# Altium PCB KATADC_V1-3.PcbDoc (part 3 of 7)
Units mm, origin at the board's own origin, x right, y up, seen from the top; angles counter-clockwise.
Board outline 127 x 85.85 mm, 6 copper layers (Top Layer, InnerPlane1, InnerPlane2, InnerPlane3, InnerPlane4, Bottom Layer), stack 1.255 mm thick; 189 components, 188 nets, 905 pads, 1090 vias.
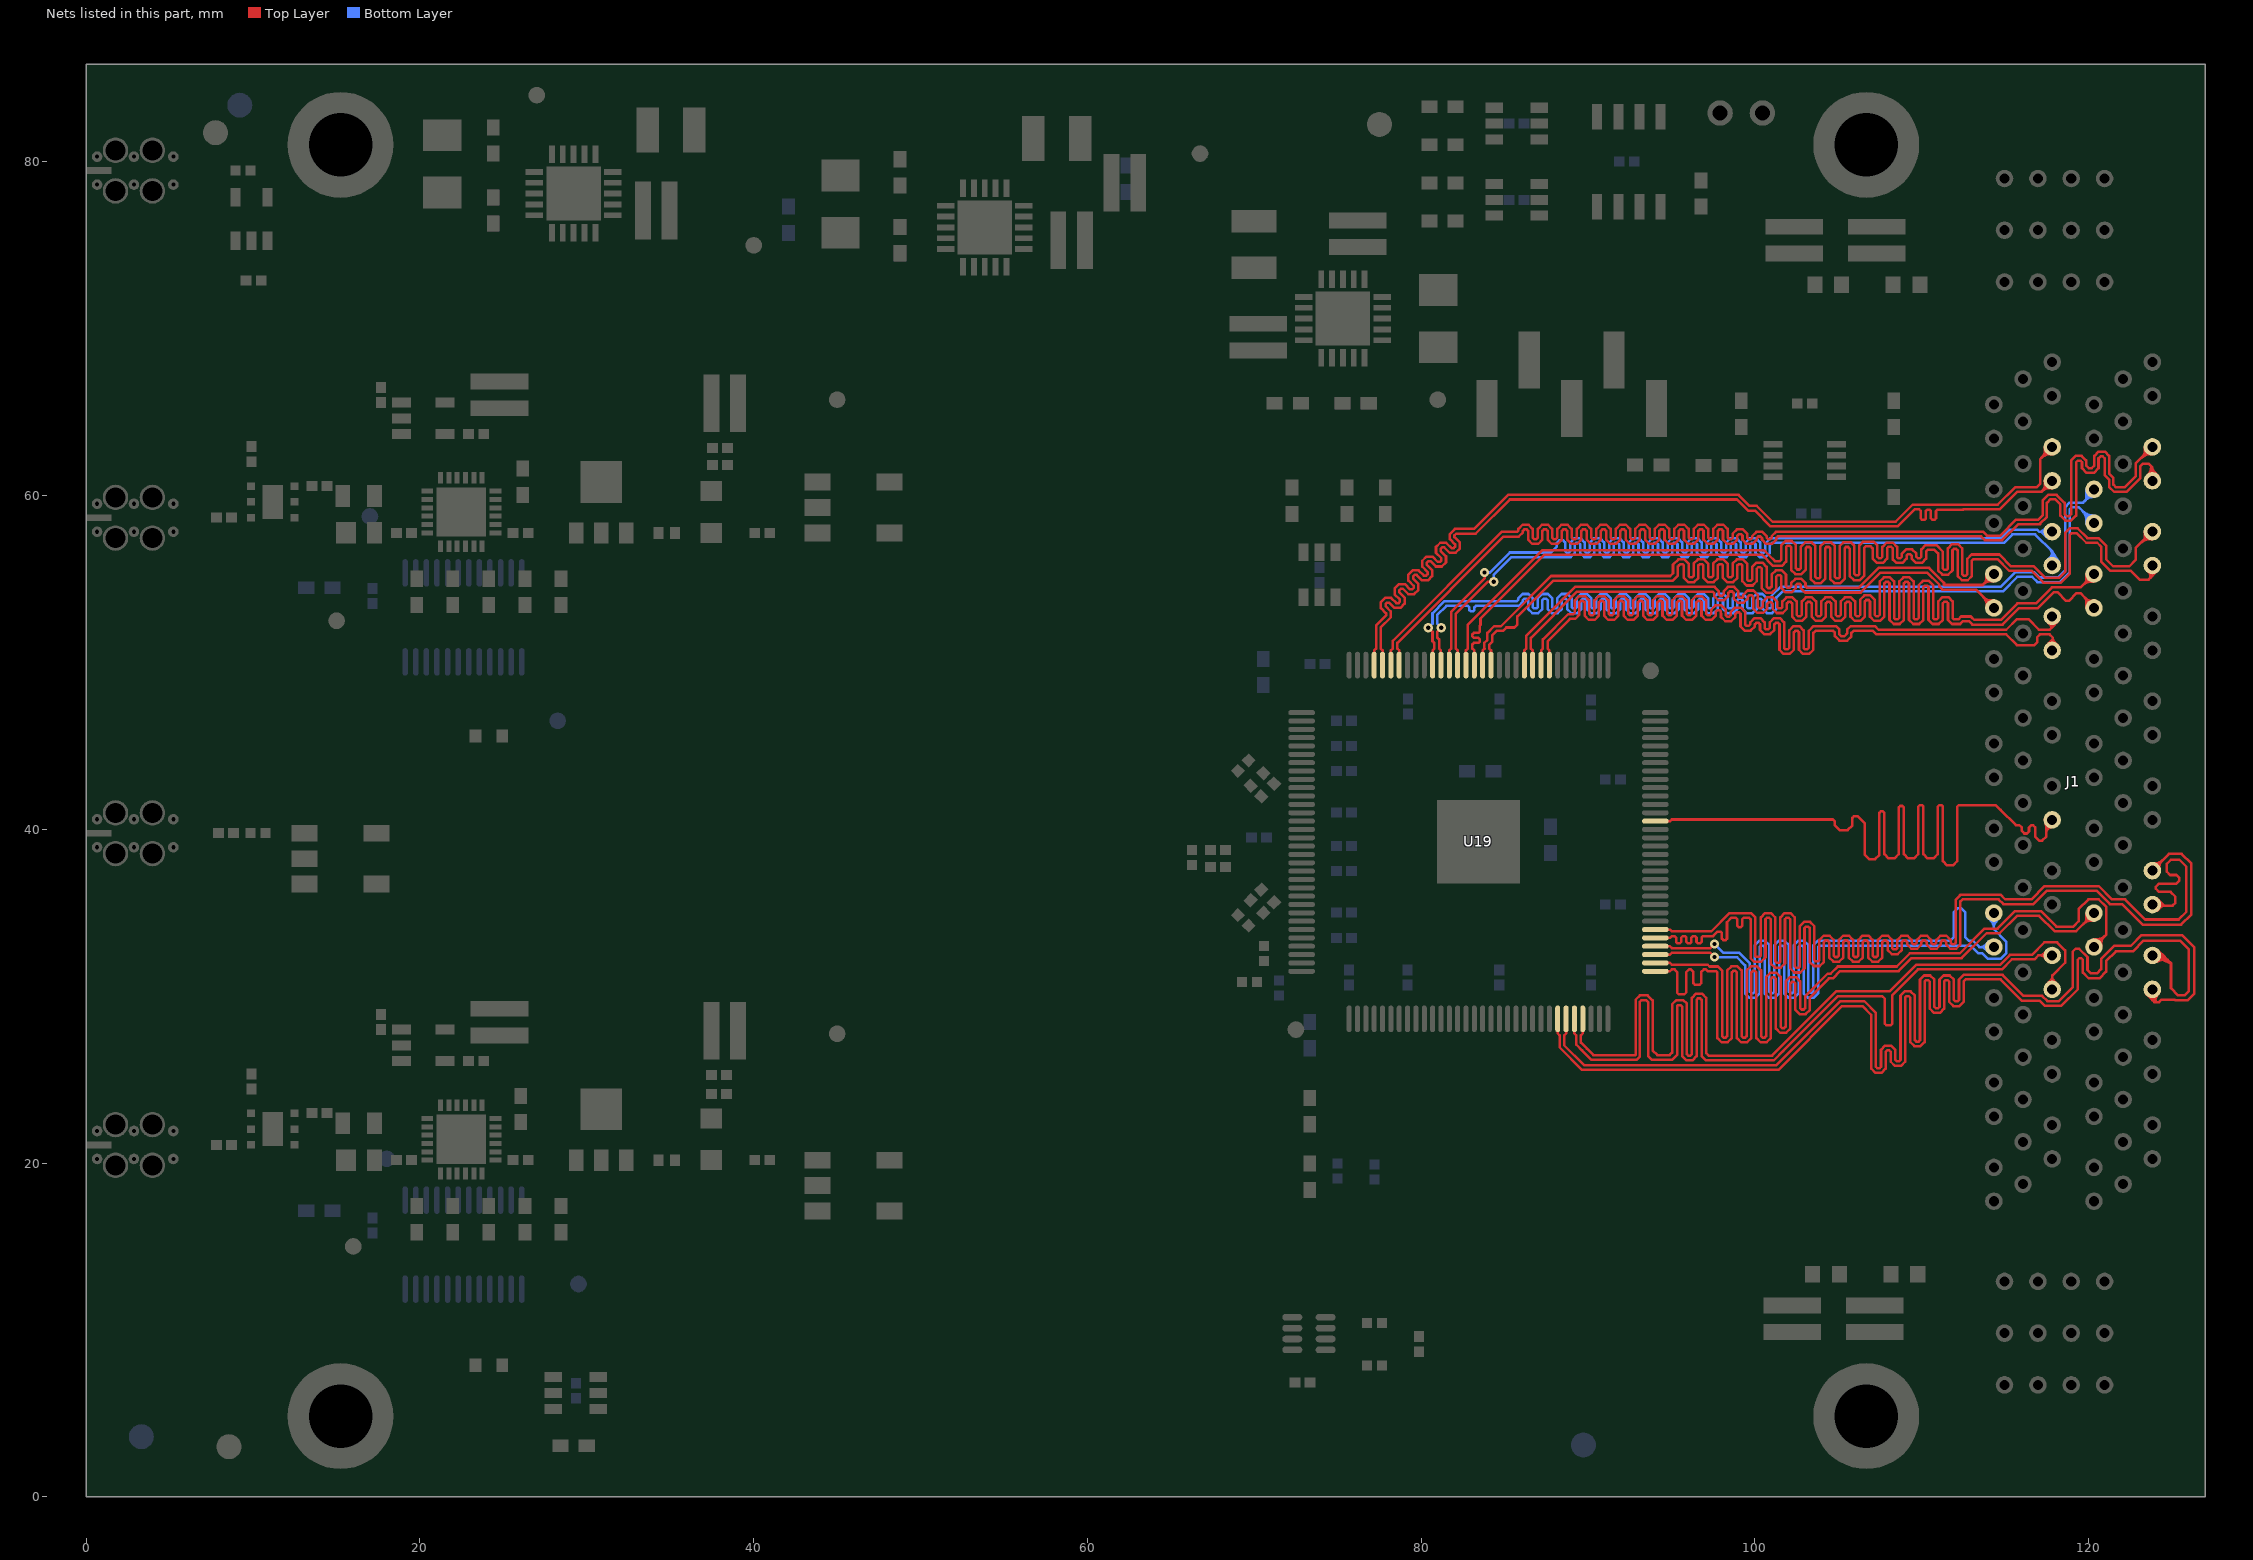
[diagram p7: the nets of this part, all layers, seen from the top]

## Via types
v1: diameter 0.55, hole 0.25, Top Layer to Bottom Layer, tented both sides, 1066 vias
v2: diameter 3.302, hole 2.2, Top Layer to Bottom Layer, tented both sides, 18 vias
v3: diameter 0.65, hole 0.25, Top Layer to Bottom Layer, tented both sides, 4 vias
v4: diameter 0.51, hole 0.25, Top Layer to Bottom Layer, tented both sides, 1 vias
v5: diameter 0.55, hole 0.25, Top Layer to Bottom Layer, 1 vias

## Nets (pads, with @x,y where several pads share a name; then routed paths per layer and width w, separated by ;. In a path a pad name is that pad's centre, name@x,y a point inside that pad or via, vN(x,y) a via of type N, cw(c..) or ccw(c..) an arc to the next point about the centre after c; other vN are vias at no path point) (continued)
DI7-: J1.D12 U19.83 | length 57.9
  Top Layer w0.152: U19.83@94.488,40.488 94.92,40.488 95.021,40.589 104.673,40.589 104.8,40.462 104.8,40.234 105.08,39.954 105.562,39.954 105.842,40.234 105.842,40.691 105.943,40.792 106.147,40.792 106.596,40.343 106.596,38.466 106.849,38.213 107.207,38.213 107.46,38.466 107.46,40.986 107.549,41.075 107.675,41.075 107.765,40.986 107.765,38.51 108.018,38.257 108.375,38.257 108.628,38.51 108.628,41.309 108.718,41.398 108.844,41.398 108.933,41.309 108.933,38.51 109.186,38.257 109.544,38.257 109.797,38.51 109.797,41.362 109.886,41.451 110.012,41.451 110.101,41.362 110.101,38.51 110.354,38.257 110.712,38.257 110.965,38.51 110.965,41.362 111.054,41.451 111.181,41.451 111.27,41.362 111.27,38.089 111.523,37.836 111.881,37.836 112.133,38.089 112.133,41.362 112.223,41.451 114.429,41.451 114.808,41.072 ; 114.728,41.163 115.642,40.249 115.849,40.249 116.002,40.096 116.002,39.904 116.154,39.751 116.307,39.751 116.434,39.878 116.434,40.107 116.561,40.234 116.688,40.234 116.815,40.107 116.815,39.548 117.043,39.319 117.221,39.319 117.475,39.573 117.475,39.852 ; J1.D12@117.375,40.6 117.398,40.484 J1.D12@117.425,40.35 ; 117.544,40.019 J1.D12@117.675,40.15 ; J1.D12@117.825,40.538 J1.D12@117.831,40.538 ; J1.D12@117.831,40.564 J1.D12@117.831,40.538 ; J1.D12@117.925,40.175 117.544,40.019 ccw(c117.712,39.852) 117.475,39.852 ; J1.D12@117.425,40.35 cw(c117.304,40.229) 117.475,40.229 J1.D12@117.475,40.183 ; J1.D12@117.425,40.35 117.475,40.102 ; 117.475,39.852 117.475,40.102 ; 117.475,40.102 J1.D12@117.475,40.183 ; J1.D12@117.475,40.183 J1.D12@117.831,40.538
DID0+: J1.D3 U19.125 | length 57.9
  Top Layer w0.152: U19.125@77.189,49.843 77.189,50.719 ; U19.125@77.189,50.493 77.189,50.719 ; J1.D3@117.375,62.9 117.375,62.638 cw(c116.946,62.638) 117.249,62.334 ; J1.D3@117.83,62.915 117.249,62.334 ; J1.D3@117.85,62.475 117.825,62.475 117.677,62.475 ccw(c117.677,61.782) 117.187,62.272 ; 77.189,50.719 77.299,50.83 77.299,52.217 77.903,52.82 77.903,52.947 77.589,53.26 77.589,53.618 77.842,53.871 78.199,53.871 78.518,53.552 78.645,53.552 78.734,53.641 78.734,53.768 78.415,54.086 78.415,54.444 78.668,54.697 79.026,54.697 79.345,54.378 79.471,54.378 79.56,54.467 79.56,54.593 79.241,54.913 79.241,55.27 79.494,55.523 79.852,55.523 80.171,55.204 80.298,55.204 80.387,55.293 80.387,55.419 80.067,55.739 80.067,56.097 80.32,56.35 80.678,56.35 80.997,56.031 81.123,56.031 81.212,56.12 81.212,56.246 80.894,56.565 80.894,56.923 81.147,57.176 81.504,57.176 81.824,56.856 81.95,56.856 82.039,56.946 82.039,57.072 81.72,57.391 81.72,57.691 82.03,58.002 83.173,58.002 85.219,60.047 99.033,60.047 99.695,59.385 100.117,59.385 101.068,58.434 108.438,58.434 109.457,59.453 114.557,59.453 115.603,60.498 116.886,60.498 117.094,60.706 117.094,62.179 117.187,62.272 ; 117.187,62.272 117.249,62.334
DID0-: J1.D4 U19.124 | length 57.9
  Top Layer w0.152: U19.124@77.689,49.843 77.689,50.719 ; U19.124@77.689,50.493 77.689,50.719 ; 117.187,60.247 cw(c117.677,59.757) 117.249,60.302 cw(c117.677,59.757) 117.677,60.45 J1.D4@117.825,60.45 ; 117.249,60.309 ccw(c116.946,60.613) 117.375,60.613 J1.D4@117.375,60.875 ; J1.D4@117.805,60.858 117.165,60.219 115.719,60.219 114.673,59.173 112.504,59.173 112.497,59.166 110.949,59.166 110.86,59.077 110.86,58.638 110.775,58.553 110.637,58.553 110.555,58.634 110.555,59.077 110.466,59.166 110.34,59.166 110.251,59.077 110.251,58.638 110.16,58.547 110.033,58.547 109.946,58.634 109.946,59.084 109.856,59.173 109.572,59.173 108.554,58.154 100.952,58.154 100.001,59.106 99.593,59.106 98.931,59.768 85.32,59.768 83.275,57.722 82.108,57.722 81.999,57.614 81.999,57.507 82.319,57.188 82.319,56.83 82.066,56.577 81.708,56.577 81.388,56.896 81.262,56.896 81.173,56.807 81.173,56.681 81.492,56.362 81.492,56.004 81.239,55.751 80.881,55.751 80.562,56.07 80.436,56.07 80.347,55.981 80.347,55.855 80.666,55.535 80.666,55.177 80.413,54.924 80.056,54.924 79.736,55.244 79.61,55.244 79.521,55.155 79.521,55.028 79.84,54.709 79.84,54.351 79.587,54.098 79.229,54.098 78.91,54.418 78.784,54.418 78.694,54.328 78.694,54.202 79.013,53.883 79.013,53.526 78.76,53.273 78.403,53.273 78.084,53.592 77.957,53.592 77.868,53.502 77.868,53.376 78.182,53.062 78.182,52.705 77.579,52.101 77.579,50.83 77.689,50.719
DID1+: J1.A3 U19.123 | length 77.3
  Top Layer w0.152: U19.123@78.189,49.843 78.189,50.719 ; U19.123@78.189,50.493 78.189,50.719 ; 121.487,60.655 121.487,61.065 121.233,61.319 121.233,62.384 120.98,62.636 120.599,62.636 120.347,62.384 120.347,61.8 120.193,61.646 120.015,61.646 119.861,61.8 119.861,62.106 119.585,62.382 119.228,62.382 118.974,62.128 118.974,58.903 118.847,58.776 118.693,58.776 118.566,58.903 118.566,59.566 118.088,60.044 117.575,60.044 117.246,59.715 117.246,58.817 116.99,58.56 115.665,58.56 114.712,57.607 113.909,57.607 113.677,57.84 101.508,57.84 101.499,57.831 101.268,57.831 101.015,57.578 101.015,57.48 100.926,57.391 100.799,57.391 100.71,57.48 100.71,57.576 100.457,57.829 100.099,57.829 99.846,57.576 99.846,57.48 99.757,57.391 99.631,57.391 99.542,57.48 99.542,57.722 99.289,57.975 98.931,57.975 98.678,57.722 98.678,57.48 98.589,57.391 98.463,57.391 98.373,57.48 98.373,58.001 98.12,58.254 97.763,58.254 97.51,58.001 97.51,57.48 97.42,57.391 97.294,57.391 97.205,57.48 97.205,58.001 96.952,58.254 96.594,58.254 96.341,58.001 96.341,57.48 96.252,57.391 96.126,57.391 96.036,57.48 96.036,58.001 95.784,58.254 95.426,58.254 95.173,58.001 95.173,57.48 95.084,57.391 94.957,57.391 94.868,57.48 94.868,58.001 94.615,58.254 94.257,58.254 94.004,58.001 94.004,57.48 93.915,57.391 93.789,57.391 93.7,57.48 93.7,58.001 93.447,58.254 93.089,58.254 92.836,58.001 92.836,57.48 92.747,57.391 92.621,57.391 92.531,57.48 92.531,58.001 92.278,58.254 91.921,58.254 91.668,58.001 91.668,57.48 91.578,57.391 91.452,57.391 91.363,57.48 91.363,58.001 91.11,58.254 90.752,58.254 90.499,58.001 90.499,57.48 90.41,57.391 90.284,57.391 90.194,57.48 90.194,58.001 89.942,58.254 89.584,58.254 89.331,58.001 89.331,57.48 89.242,57.391 89.115,57.391 89.026,57.48 89.026,58.001 88.773,58.254 88.415,58.254 88.162,58.001 88.162,57.48 88.073,57.391 87.947,57.391 87.858,57.48 87.858,58.001 87.605,58.254 87.247,58.254 86.994,58.001 86.994,57.48 86.905,57.391 86.779,57.391 86.689,57.48 86.689,58.001 86.436,58.254 86.079,58.254 85.826,58.001 85.826,57.912 85.736,57.823 84.823,57.823 78.299,51.299 78.299,50.83 78.189,50.719 ; 121.488,60.655 121.645,60.498 122.168,60.498 122.827,61.158 122.827,61.918 J1.A3@123.825,62.916 ; 123.187,62.272 cw(c123.677,61.782) 123.677,62.475 J1.A3@123.825,62.475 ; 123.249,62.334 ccw(c122.946,62.638) 123.288,62.378 ccw(c122.946,62.638) 123.375,62.638 J1.A3@123.375,62.9 ; J1.A3@123.8,62.99 123.842,62.948 J1.A3@123.82,62.925
DID1-: J1.A4 U19.122 | length 77.3
  Top Layer w0.152: U19.122@78.689,49.843 78.689,50.719 ; U19.122@78.689,50.493 78.689,50.719 ; 121.234,60.935 121.234,60.909 ; J1.A4@123.55,61.225 ccw(c123.068,61.707) 123.75,61.707 123.75,61.772 ; J1.A4@123.825,60.935 123.825,61.697 ; 123.946,61.404 cw(c124.239,61.697) 123.825,61.697 ; 123.946,61.404 124.142,61.208 J1.A4@124.15,61.2 ; 78.689,50.719 78.579,50.83 78.579,51.172 84.95,57.543 85.852,57.543 86.105,57.796 86.105,57.886 86.194,57.975 86.321,57.975 86.41,57.886 86.41,57.364 86.663,57.111 87.021,57.111 87.273,57.364 87.273,57.886 87.363,57.975 87.489,57.975 87.578,57.886 87.578,57.364 87.831,57.111 88.189,57.111 88.442,57.364 88.442,57.886 88.531,57.975 88.657,57.975 88.747,57.886 88.747,57.364 89,57.111 89.357,57.111 89.61,57.364 89.61,57.886 89.7,57.975 89.826,57.975 89.915,57.886 89.915,57.364 90.168,57.111 90.526,57.111 90.779,57.364 90.779,57.886 90.868,57.975 90.994,57.975 91.083,57.886 91.083,57.364 91.336,57.111 91.694,57.111 91.947,57.364 91.947,57.886 92.036,57.975 92.163,57.975 92.252,57.886 92.252,57.364 92.505,57.111 92.863,57.111 93.115,57.364 93.115,57.886 93.205,57.975 93.331,57.975 93.42,57.886 93.42,57.364 93.673,57.111 94.031,57.111 94.284,57.364 94.284,57.886 94.373,57.975 94.499,57.975 94.589,57.886 94.589,57.364 94.842,57.111 95.199,57.111 95.452,57.364 95.452,57.886 95.542,57.975 95.668,57.975 95.757,57.886 95.757,57.364 96.01,57.111 96.368,57.111 96.621,57.364 96.621,57.886 96.71,57.975 96.836,57.975 96.925,57.886 96.925,57.364 97.178,57.111 97.536,57.111 97.789,57.364 97.789,57.886 97.878,57.975 98.005,57.975 98.094,57.886 98.094,57.364 98.347,57.111 98.705,57.111 98.957,57.364 98.957,57.605 99.047,57.695 99.173,57.695 99.262,57.605 99.262,57.364 99.515,57.111 99.873,57.111 100.126,57.364 100.126,57.46 100.215,57.549 100.341,57.549 100.431,57.46 100.431,57.364 100.684,57.111 101.041,57.111 101.294,57.364 101.294,57.463 101.384,57.552 101.615,57.552 101.623,57.56 113.561,57.56 113.794,57.328 114.828,57.328 115.78,58.28 117.105,58.28 117.105,58.318 117.499,58.712 117.499,59.561 117.729,59.792 117.983,59.792 118.313,59.461 118.313,58.798 118.615,58.496 118.948,58.496 119.253,58.801 119.253,62.001 119.355,62.103 119.507,62.103 119.609,62.001 119.609,61.646 119.888,61.366 120.32,61.366 120.599,61.646 120.599,62.23 120.726,62.357 120.853,62.357 120.98,62.23 120.98,61.214 121.234,60.96 121.234,60.909 ; 121.234,60.909 121.234,60.528 121.544,60.219 122.288,60.219 123.114,61.044 123.114,61.773 123.241,61.9 123.622,61.9 123.75,61.772 ; 123.75,61.772 123.825,61.697
DID2+: J1.C3 U19.118 | length 67.8
  Top Layer w0.152: v1(80.434,52.081) 80.683,51.832 80.683,51.279 80.77,51.191 80.799,51.191 80.799,50.83 80.689,50.719 ; U19.118@80.689,49.843 80.689,50.719 ; U19.118@80.689,50.493 80.689,50.719
  Bottom Layer w0.152: v1(80.434,52.081) 80.683,52.33 80.683,52.946 81.409,53.673 85.736,53.673 85.826,53.762 85.826,53.851 86.079,54.104 86.436,54.104 86.689,53.851 86.689,53.33 86.779,53.241 86.905,53.241 86.994,53.33 86.994,53.851 87.247,54.104 87.605,54.104 87.858,53.851 87.858,53.33 87.947,53.241 88.073,53.241 88.163,53.33 88.163,53.851 88.415,54.104 88.773,54.104 89.026,53.851 89.026,53.33 89.115,53.241 89.242,53.241 89.331,53.33 89.331,53.851 89.584,54.104 89.942,54.104 90.195,53.851 90.195,53.33 90.284,53.241 90.41,53.241 90.499,53.33 90.499,53.851 90.752,54.104 91.11,54.104 91.363,53.851 91.363,53.33 91.452,53.241 91.578,53.241 91.668,53.33 91.668,53.851 91.921,54.104 92.278,54.104 92.531,53.851 92.531,53.33 92.621,53.241 92.747,53.241 92.836,53.33 92.836,53.851 93.089,54.104 93.447,54.104 93.7,53.851 93.7,53.33 93.789,53.241 93.915,53.241 94.005,53.33 94.005,53.851 94.257,54.104 94.615,54.104 94.868,53.851 94.868,53.33 94.957,53.241 95.084,53.241 95.173,53.33 95.173,53.851 95.426,54.104 95.784,54.104 96.037,53.851 96.037,53.33 96.126,53.241 96.252,53.241 96.341,53.33 96.341,53.851 96.594,54.104 96.952,54.104 97.205,53.851 97.205,53.33 97.294,53.241 97.42,53.241 97.51,53.33 97.51,53.851 97.763,54.104 98.12,54.104 98.373,53.851 98.373,53.33 98.463,53.241 98.589,53.241 98.678,53.33 98.678,53.851 98.931,54.104 99.289,54.104 99.542,53.851 99.542,53.33 99.631,53.241 99.757,53.241 99.847,53.33 99.847,53.851 100.099,54.104 100.457,54.104 100.71,53.851 100.71,53.33 100.799,53.241 100.926,53.241 101.015,53.33 101.015,54 101.564,54.549 113.141,54.549 113.145,54.544 114.539,54.544 114.749,54.544 115.623,55.418 116.733,55.418 117.058,55.093 118.172,55.093 118.593,55.513 118.593,59.296 118.872,59.575 119.671,59.575 119.765,59.669 ; 119.828,59.731 119.765,59.669 ; J1.C3@119.875,60.375 119.875,59.934 cw(c119.5,59.934) 119.765,59.669 ; J1.C3@119.975,60.05 119.975,59.887 ccw(c119.984,59.887) 119.978,59.881 ; J1.C3@120.32,60.376 120.32,60.223 119.978,59.881 ; J1.C3@120.375,59.925 120.325,59.925 120.296,59.925 ccw(c120.296,59.263) 119.828,59.732 119.978,59.881
DID2-: J1.C4 U19.117 | length 68
  Top Layer w0.152: U19.117@81.189,49.843 81.189,50.719 ; U19.117@81.189,50.493 81.189,50.719 ; v1(81.211,52.081) 80.962,51.832 80.962,51.47 80.991,51.47 81.079,51.383 81.079,50.83 81.189,50.719
  Bottom Layer w0.152: v1(81.211,52.081) 80.962,52.33 80.962,52.844 81.511,53.393 82.802,53.393 82.891,53.304 82.891,53.146 82.981,53.057 83.107,53.057 83.196,53.146 83.196,53.304 83.285,53.393 84.524,53.393 ; 84.524,53.393 85.852,53.393 86.105,53.646 86.105,53.736 86.194,53.825 86.321,53.825 86.41,53.736 86.41,53.214 86.663,52.961 87.021,52.961 87.274,53.214 87.274,53.736 87.363,53.825 87.489,53.825 87.578,53.736 87.578,53.214 87.831,52.961 88.189,52.961 88.442,53.214 88.442,53.736 88.531,53.825 88.657,53.825 88.747,53.736 88.747,53.214 89,52.961 89.357,52.961 89.61,53.214 89.61,53.736 89.7,53.825 89.826,53.825 89.915,53.736 89.915,53.214 90.168,52.961 90.526,52.961 90.779,53.214 90.779,53.736 90.868,53.825 90.994,53.825 91.084,53.736 91.084,53.214 91.336,52.961 91.694,52.961 91.947,53.214 91.947,53.736 92.036,53.825 92.163,53.825 92.252,53.736 92.252,53.214 92.505,52.961 92.863,52.961 93.116,53.214 93.116,53.736 93.205,53.825 93.331,53.825 93.42,53.736 93.42,53.214 93.673,52.961 94.031,52.961 94.284,53.214 94.284,53.736 94.373,53.825 94.499,53.825 94.589,53.736 94.589,53.214 94.842,52.961 95.199,52.961 95.452,53.214 95.452,53.736 95.542,53.825 95.668,53.825 95.757,53.736 95.757,53.214 96.01,52.961 96.368,52.961 96.621,53.214 96.621,53.736 96.71,53.825 96.836,53.825 96.926,53.736 96.926,53.214 97.178,52.961 97.536,52.961 97.789,53.214 97.789,53.736 97.878,53.825 98.005,53.825 98.094,53.736 98.094,53.214 98.347,52.961 98.705,52.961 98.958,53.214 98.958,53.736 99.047,53.825 99.173,53.825 99.262,53.736 99.262,53.214 99.515,52.961 99.873,52.961 100.126,53.214 100.126,53.736 100.215,53.825 100.341,53.825 100.431,53.736 100.431,53.408 100.426,53.403 100.426,53.257 100.726,52.957 101.037,52.957 101.041,52.961 101.294,53.214 101.294,53.253 101.299,53.257 101.299,53.403 101.294,53.408 101.294,53.898 101.661,54.265 113.068,54.265 ; 113.068,54.264 114.864,54.264 115.739,55.139 116.617,55.139 116.942,54.813 118.288,54.813 118.872,55.397 118.872,59.18 118.987,59.295 119.425,59.295 119.624,59.096 ; J1.C4@119.875,58.325 119.875,58.35 119.875,58.49 ccw(c119.018,58.49) 119.624,59.096 ; J1.C4@120.32,58.344 120.32,58.35 120.32,58.4 119.624,59.096 ; J1.C4@120.375,58.8 120.339,58.8 cw(c120.339,59.811) 119.624,59.096
DID3+: J1.D5 U19.116 | length 57.6
  Top Layer w0.152: U19.116@81.689,49.843 81.689,50.719 ; U19.116@81.689,50.493 81.689,50.719 ; v1(83.801,55.392) 83.801,55.04 81.799,53.038 81.799,50.83 81.689,50.719
  Bottom Layer w0.152: v1(83.801,55.392) 84.119,55.392 85.319,56.591 87.782,56.591 88.138,56.947 88.138,57.175 88.29,57.328 88.468,57.328 ; 88.494,57.328 88.468,57.328 ; 110.331,57.449 114.777,57.449 115.286,57.958 116.921,57.958 117.043,57.836 117.156,57.836 ; 110.564,57.453 100.937,57.453 100.625,57.14 100.625,56.678 100.536,56.589 100.41,56.589 100.32,56.678 100.32,57.2 100.067,57.453 99.71,57.453 99.457,57.2 99.457,56.678 99.367,56.589 99.241,56.589 99.152,56.678 99.152,57.2 98.899,57.453 98.541,57.453 98.288,57.2 98.288,56.678 98.199,56.589 98.073,56.589 97.984,56.678 97.984,57.2 97.731,57.453 97.373,57.453 97.12,57.2 97.12,56.678 97.031,56.589 96.904,56.589 96.815,56.678 96.815,57.2 96.562,57.453 96.204,57.453 95.952,57.2 95.952,56.678 95.862,56.589 95.736,56.589 95.647,56.678 95.647,57.2 95.394,57.453 95.036,57.453 94.783,57.2 94.783,56.678 94.694,56.589 94.568,56.589 94.478,56.678 94.478,57.2 94.225,57.453 93.868,57.453 93.615,57.2 93.615,56.678 93.525,56.589 93.399,56.589 93.31,56.678 93.31,57.2 93.057,57.453 92.699,57.453 92.446,57.2 92.446,56.678 92.357,56.589 92.231,56.589 92.142,56.678 92.142,57.2 91.889,57.453 91.531,57.453 91.278,57.2 91.278,56.678 91.189,56.589 91.062,56.589 90.973,56.678 90.973,57.2 90.72,57.453 90.362,57.453 90.11,57.2 90.11,56.678 90.02,56.589 89.894,56.589 89.805,56.678 89.805,57.2 89.552,57.453 89.194,57.453 88.941,57.2 88.941,56.678 88.852,56.589 88.726,56.589 88.636,56.678 88.636,57.2 88.508,57.328 88.468,57.328 ; J1.D5@117.5,58.1 117.156,57.836 ; J1.D5@117.525,57.5 117.52,57.505 117.156,57.836 ; J1.D5@117.804,57.86 117.78,57.836 117.156,57.836
DID3-: J1.D6 U19.115 | length 58.8
  Top Layer w0.152: U19.115@82.189,49.843 82.189,50.719 ; U19.115@82.189,50.493 82.189,50.719 ; v1(84.351,54.842) 83.999,54.842 82.079,52.923 82.079,50.83 82.189,50.719
  Bottom Layer w0.152: v1(84.351,54.842) 84.351,55.233 85.428,56.31 88.968,56.31 89.221,56.563 89.221,57.084 89.31,57.173 89.436,57.173 89.525,57.084 89.525,56.563 89.778,56.31 90.136,56.31 90.389,56.563 90.389,57.084 90.478,57.173 90.604,57.173 90.694,57.084 90.694,56.563 90.947,56.31 91.304,56.31 91.557,56.563 91.557,57.084 91.647,57.173 91.773,57.173 91.862,57.084 91.862,56.563 92.115,56.31 92.473,56.31 92.726,56.563 92.726,57.084 92.815,57.173 92.941,57.173 93.031,57.084 93.031,56.563 93.283,56.31 93.641,56.31 93.894,56.563 93.894,57.084 93.983,57.173 94.11,57.173 94.199,57.084 94.199,56.563 94.452,56.31 94.81,56.31 95.063,56.563 95.063,57.084 95.152,57.173 95.278,57.173 95.367,57.084 95.367,56.563 95.62,56.31 95.978,56.31 96.231,56.563 96.231,57.084 96.32,57.173 96.446,57.173 96.536,57.084 96.536,56.563 96.789,56.31 97.146,56.31 97.399,56.563 97.399,57.084 97.489,57.173 97.615,57.173 97.704,57.084 97.704,56.563 97.957,56.31 98.315,56.31 98.568,56.563 98.568,57.084 98.657,57.173 98.783,57.173 98.873,57.084 98.873,56.563 99.125,56.31 99.483,56.31 99.736,56.563 99.736,57.084 99.825,57.173 99.952,57.173 100.041,57.084 100.041,56.563 100.294,56.31 100.652,56.31 100.905,56.563 100.905,57.037 101.04,57.173 110.822,57.173 ; 110.338,57.17 114.929,57.17 115.438,57.679 116.794,57.679 117.831,56.642 ; J1.D6@117.525,56.125 117.681,56.281 ccw(c117.32,56.642) 117.821,56.545 ; 117.725,56.725 117.821,56.545 ; J1.D6@117.831,55.778 117.831,55.81 117.831,56.528 ; J1.D6@118.175,56.1 J1.D6@118.159,56.116 ; J1.D6@118.2,56.05 J1.D6@118.159,56.116 ; 117.821,56.545 ccw(c117.32,56.642) 117.831,56.642 ; 117.821,56.545 117.831,56.528 ; 117.831,56.528 117.831,56.642 ; 117.831,56.642 ccw(c118.308,56.642) 117.97,56.305 118.145,56.13 J1.D6@118.159,56.116 ; 117.831,56.642 J1.D6@118.159,56.116
DID4+: J1.A5 U19.114 | length 77.1
  Top Layer w0.152: U19.114@82.689,49.843 82.689,50.719 82.799,50.83 82.799,52.271 87.267,56.738 100.542,56.738 100.837,56.443 101.207,56.073 101.507,56.073 101.597,56.162 101.597,56.471 ; 101.597,56.471 101.597,57.028 101.85,57.281 102.207,57.281 102.46,57.028 102.46,55.662 102.55,55.572 102.676,55.572 102.765,55.662 102.765,56.943 103.022,57.201 103.403,57.201 103.629,56.976 103.629,55.125 103.718,55.035 103.844,55.035 103.933,55.125 103.933,56.969 104.165,57.201 104.572,57.201 104.797,56.976 104.797,55.125 104.886,55.035 105.013,55.035 105.102,55.125 105.102,56.994 105.308,57.201 105.766,57.201 105.918,57.048 ; 105.965,57.001 105.965,55.309 106.055,55.22 106.181,55.22 106.27,55.309 106.27,57.02 106.475,57.225 107.139,57.225 107.344,57.019 107.344,56.335 107.433,56.246 107.559,56.246 107.649,56.335 107.649,56.925 107.899,57.175 108.28,57.175 108.533,56.923 108.533,56.315 108.602,56.246 108.728,56.246 108.817,56.335 108.817,56.521 109.07,56.774 109.428,56.774 109.681,56.521 109.681,56.335 109.77,56.246 109.896,56.246 109.986,56.335 109.986,56.777 110.238,57.029 110.88,57.029 111.263,56.647 111.263,55.64 111.355,55.547 111.478,55.547 111.567,55.637 111.567,56.836 111.82,57.089 112.178,57.089 112.431,56.836 112.431,55.297 112.52,55.208 112.647,55.208 112.736,55.297 112.736,56.217 112.989,56.47 114.66,56.47 115.366,55.765 116.72,55.765 117.418,55.067 118.23,55.067 118.593,55.43 118.593,57.76 118.872,58.039 119.356,58.039 119.94,57.455 120.601,57.455 121.056,56.999 121.056,56.186 121.474,55.768 122.443,55.768 122.827,56.152 122.827,56.853 123.82,57.845 123.842,57.868 J1.A5@123.8,57.91 ; 123.187,57.197 cw(c123.677,56.707) 123.677,57.4 J1.A5@123.825,57.4 ; 123.249,57.259 ccw(c122.946,57.563) 123.309,57.335 ccw(c122.946,57.563) 123.375,57.563 J1.A5@123.375,57.825
DID4-: J1.A6 U19.113 | length 76.9
  Top Layer w0.152: U19.113@83.189,49.843 83.189,50.719 ; U19.113@83.189,50.493 83.189,50.719 ; 101.876,56.355 101.876,56.046 101.623,55.793 101.092,55.793 100.426,56.459 87.383,56.459 83.559,52.635 83.559,52.252 83.518,52.212 83.518,51.868 83.429,51.779 83.168,51.779 83.079,51.689 83.079,51.563 83.168,51.474 83.427,51.474 83.517,51.384 83.517,51.258 83.427,51.169 83.168,51.169 83.079,51.08 83.079,50.83 83.189,50.719 ; 101.876,56.355 101.876,56.912 101.965,57.001 102.092,57.001 102.181,56.912 102.181,55.546 102.434,55.293 102.792,55.293 103.044,55.546 103.044,56.842 103.124,56.921 103.276,56.921 103.349,56.849 103.349,55.009 103.602,54.756 103.96,54.756 104.213,55.009 104.213,56.842 104.292,56.921 104.445,56.921 104.521,56.845 104.518,56.842 104.518,55.009 104.771,54.756 105.128,54.756 105.381,55.009 105.381,56.842 105.461,56.921 105.588,56.921 105.686,56.823 105.686,55.193 105.939,54.941 106.297,54.941 106.55,55.193 106.55,56.867 106.655,56.972 106.934,56.972 107.065,56.842 107.065,56.219 107.317,55.966 107.675,55.966 107.928,56.219 107.928,56.847 108.004,56.923 108.176,56.923 108.28,56.818 108.28,56.172 108.486,55.966 108.844,55.966 109.097,56.219 109.097,56.405 109.186,56.494 109.312,56.494 109.401,56.405 109.401,56.219 109.654,55.966 110.012,55.966 110.265,56.219 110.265,56.661 110.354,56.75 110.764,56.75 110.983,56.531 110.983,55.524 111.24,55.268 111.594,55.268 111.847,55.521 111.847,56.72 111.936,56.809 112.062,56.809 112.152,56.72 112.152,55.182 112.405,54.929 112.762,54.929 113.015,55.182 113.015,56.102 113.105,56.191 114.544,56.191 115.25,55.485 116.604,55.485 117.302,54.788 118.345,54.788 118.872,55.314 118.872,57.633 118.974,57.734 119.304,57.734 119.863,57.175 120.523,57.175 120.752,56.947 120.752,56.058 121.321,55.489 122.54,55.489 123.063,54.966 123.596,54.966 123.72,55.089 ; J1.A6@123.55,55.475 123.567,55.458 cw(c123.198,55.089) 123.72,55.089 ; J1.A6@123.825,55.829 J1.A6@123.825,55.81 123.825,55.194 ; J1.A6@124.1,55.475 123.829,55.204 ccw(c123.839,55.194) 123.825,55.194 ; 123.72,55.089 123.825,55.194
DID5+: J1.F5 U19.112 | length 48.2
  Top Layer w0.152: U19.112@83.689,49.843 83.689,50.719 ; U19.112@83.689,50.493 83.689,50.719 ; 83.795,50.851 83.795,51.181 83.972,51.359 83.972,51.765 84.379,52.172 84.785,52.172 87.795,55.182 94.933,55.182 95.098,55.347 95.098,55.859 95.418,56.18 95.776,56.18 96.029,55.927 96.029,55.19 96.118,55.1 96.244,55.1 96.333,55.19 96.333,55.927 96.586,56.18 96.944,56.18 97.197,55.927 97.197,55.19 97.286,55.1 97.412,55.1 97.502,55.19 97.502,55.927 97.755,56.18 98.112,56.18 98.365,55.927 98.365,55.19 98.455,55.1 98.581,55.1 98.67,55.19 98.67,55.927 98.923,56.18 99.281,56.18 99.534,55.927 99.534,54.983 99.623,54.893 99.749,54.893 99.839,54.983 99.839,55.735 100.092,55.987 100.449,55.987 100.702,55.735 100.702,54.554 100.791,54.465 100.918,54.465 101.007,54.554 101.007,55.261 101.26,55.514 101.618,55.514 101.871,55.261 101.871,54.569 101.96,54.479 102.086,54.479 102.175,54.569 102.175,54.757 102.428,55.01 102.786,55.01 103.039,54.757 103.039,54.561 103.074,54.526 103.128,54.472 106.226,54.472 107.418,55.665 110.448,55.665 111.339,54.774 111.339,54.657 111.352,54.644 113.648,54.644 114.315,55.31 J1.F5@114.325,55.321 ; 83.799,50.83 83.689,50.719 ; 113.687,54.672 cw(c114.177,54.182) 114.177,54.875 J1.F5@114.325,54.875 ; 113.749,54.734 ccw(c113.446,55.038) 113.8,54.796 ccw(c113.446,55.038) 113.875,55.038 J1.F5@113.875,55.3
DID5-: J1.F6 U19.111 | length 48.2
  Top Layer w0.152: U19.111@84.189,49.843 84.189,50.719 ; U19.111@84.189,50.493 84.189,50.719 ; 113.697,53.913 cw(c113.207,53.423) 113.9,53.423 J1.F6@113.9,53.275 ; 113.759,53.851 ccw(c114.063,54.154) 113.798,53.816 ccw(c114.063,54.154) 114.063,53.725 J1.F6@114.325,53.725 ; J1.F6@114.325,53.289 113.25,54.365 111.236,54.365 111.059,54.541 111.059,54.658 110.332,55.385 107.534,55.385 106.341,54.193 103.013,54.193 102.76,54.446 102.76,54.641 102.67,54.73 102.544,54.73 102.455,54.641 102.455,54.453 102.202,54.2 101.844,54.2 101.591,54.453 101.591,55.145 101.502,55.235 101.376,55.235 101.286,55.145 101.286,54.438 101.033,54.185 100.676,54.185 100.423,54.438 100.423,55.619 100.333,55.708 100.207,55.708 100.118,55.619 100.118,54.867 99.865,54.614 99.507,54.614 99.254,54.867 99.254,55.811 99.165,55.9 99.039,55.9 98.95,55.811 98.95,55.074 98.697,54.821 98.339,54.821 98.086,55.074 98.086,55.811 97.997,55.9 97.87,55.9 97.781,55.811 97.781,55.074 97.528,54.821 97.171,54.821 96.918,55.074 96.918,55.811 96.828,55.9 96.702,55.9 96.613,55.811 96.613,55.074 96.36,54.821 96.002,54.821 95.749,55.074 95.749,55.811 95.66,55.9 95.534,55.9 95.444,55.811 95.377,55.744 95.377,55.194 95.085,54.902 87.922,54.902 85.776,52.756 85.776,52.273 85.598,52.095 85.115,52.095 84.912,51.892 84.531,51.892 84.277,51.638 84.277,51.257 84.079,51.059 84.079,50.83 84.189,50.719
DID6+: J1.C5 U19.107 | length 67.6
  Top Layer w0.152: U19.107@86.189,49.843 86.189,50.719 ; U19.107@86.189,50.493 86.189,50.719 ; 119.687,54.647 cw(c120.177,54.157) 120.177,54.85 J1.C5@120.325,54.85 ; 119.749,54.709 ccw(c119.446,55.013) 119.81,54.786 ccw(c119.446,55.013) 119.875,55.013 J1.C5@119.875,55.275 ; J1.C5@120.32,55.296 119.519,54.495 117.804,54.495 116.85,53.541 115.731,53.541 114.743,52.553 113.151,52.553 113.026,52.677 112.947,52.756 112.37,52.756 112.198,52.584 111.947,52.584 111.857,52.673 111.857,53.666 111.605,53.919 111.247,53.919 110.994,53.666 110.994,52.673 110.905,52.584 110.778,52.584 110.689,52.673 110.689,54.633 110.436,54.886 110.078,54.886 109.825,54.633 109.825,52.673 109.736,52.584 109.61,52.584 109.521,52.673 109.521,54.853 109.268,55.106 108.91,55.106 108.657,54.853 108.657,52.673 108.568,52.584 108.442,52.584 108.352,52.673 108.352,54.853 108.099,55.106 107.742,55.106 107.489,54.853 107.489,52.859 107.399,52.77 107.273,52.77 107.184,52.859 107.184,53.77 106.931,54.023 106.573,54.023 106.32,53.77 106.32,52.859 106.231,52.77 106.105,52.77 106.015,52.859 106.015,53.654 105.763,53.907 105.405,53.907 105.152,53.654 105.152,52.859 105.063,52.77 104.936,52.77 104.847,52.859 104.847,53.654 104.594,53.907 104.236,53.907 103.983,53.654 103.983,52.859 103.894,52.77 103.768,52.77 103.679,52.859 103.679,53.654 103.426,53.907 103.068,53.907 102.815,53.654 102.815,52.859 102.726,52.77 102.6,52.77 102.51,52.859 102.51,53.654 102.257,53.907 101.9,53.907 101.647,53.654 101.647,53.335 101.557,53.246 101.431,53.246 101.342,53.335 101.342,53.643 101.089,53.896 100.731,53.896 100.478,53.643 100.478,53.346 100.389,53.257 100.263,53.257 100.173,53.346 100.173,54.06 99.921,54.313 99.563,54.313 99.31,54.06 99.31,53.962 99.221,53.872 99.094,53.872 99.005,53.962 99.005,54.281 98.752,54.534 98.394,54.534 98.141,54.281 98.141,54.101 98.052,54.012 97.926,54.012 97.837,54.101 97.837,54.275 97.584,54.528 89.233,54.528 86.299,51.595 86.299,50.83 86.189,50.719
DID6-: J1.C6 U19.106 | length 67.7
  Top Layer w0.152: U19.106@86.689,49.843 86.689,50.719 ; U19.106@86.689,50.493 86.689,50.719 ; 119.782,53.878 119.507,54.153 119.278,54.153 118.821,53.696 118.655,53.696 118.135,54.215 117.919,54.215 116.966,53.261 115.847,53.261 114.854,52.269 113.035,52.269 112.827,52.476 112.471,52.476 112.299,52.305 111.831,52.305 111.578,52.558 111.578,53.55 111.489,53.639 111.363,53.639 111.273,53.55 111.273,52.558 111.02,52.305 110.663,52.305 110.41,52.558 110.41,54.517 110.32,54.607 110.194,54.607 110.105,54.517 110.105,52.558 109.852,52.305 109.494,52.305 109.241,52.558 109.241,54.737 109.152,54.826 109.026,54.826 108.936,54.737 108.936,52.558 108.684,52.305 108.326,52.305 108.073,52.558 108.073,54.737 107.984,54.826 107.857,54.826 107.768,54.737 107.768,52.743 107.515,52.49 107.157,52.49 106.904,52.743 106.904,53.655 106.815,53.744 106.689,53.744 106.6,53.655 106.6,52.743 106.347,52.49 105.989,52.49 105.736,52.743 105.736,53.538 105.647,53.628 105.521,53.628 105.431,53.538 105.431,52.743 105.178,52.49 104.821,52.49 104.568,52.743 104.568,53.538 104.478,53.628 104.352,53.628 104.263,53.538 104.263,52.743 104.01,52.49 103.652,52.49 103.399,52.743 103.399,53.538 103.31,53.628 103.184,53.628 103.094,53.538 103.094,52.743 102.842,52.49 102.484,52.49 102.231,52.743 102.231,53.538 102.142,53.628 102.015,53.628 101.926,53.538 101.926,53.219 101.673,52.966 101.315,52.966 101.062,53.219 101.062,53.527 100.973,53.616 100.847,53.616 100.758,53.527 100.758,53.231 100.505,52.978 100.147,52.978 99.894,53.231 99.894,53.945 99.805,54.034 99.679,54.034 99.589,53.945 99.589,53.846 99.336,53.593 98.979,53.593 98.726,53.846 98.726,54.165 98.636,54.255 98.51,54.255 98.421,54.165 98.421,53.985 98.168,53.732 97.81,53.732 97.557,53.985 97.557,54.159 97.468,54.248 89.348,54.248 86.579,51.479 86.579,50.83 86.689,50.719 ; J1.C6@119.875,53.275 119.875,53.653 ccw(c119.557,53.653) 119.782,53.878 ; J1.C6@120.32,53.289 J1.C6@120.332,53.277 ; J1.C6@120.345,53.315 119.782,53.878 ; J1.C6@120.425,53.7 120.325,53.7 120.212,53.7 cw(c120.212,54.309) 119.782,53.878
DID7+: J1.D7 U19.105 | length 57.4
  Top Layer w0.152: U19.105@87.189,49.843 87.189,50.719 ; U19.105@87.189,50.493 87.189,50.719 ; 105.74,52.172 105.537,51.968 105.537,51.74 105.359,51.562 105.207,51.562 105.054,51.714 105.054,51.994 104.87,52.178 103.511,52.178 103.232,51.899 103.232,50.878 103.143,50.789 103.016,50.789 102.927,50.878 102.927,51.925 102.674,52.178 102.316,52.178 102.064,51.925 102.064,50.878 101.974,50.789 101.848,50.789 101.759,50.878 101.759,52.405 101.506,52.657 101.148,52.657 100.895,52.405 100.895,52.074 100.806,51.984 100.68,51.984 100.59,52.074 100.59,52.405 100.337,52.657 99.98,52.657 99.727,52.405 99.727,52.282 99.637,52.193 99.511,52.193 99.422,52.282 99.422,53.031 99.169,53.284 98.811,53.284 98.558,53.031 98.558,52.84 98.469,52.75 98.343,52.75 98.254,52.84 98.254,53.031 98.247,53.037 98.247,53.175 98.001,53.422 97.643,53.422 97.39,53.169 97.39,52.921 97.301,52.832 97.174,52.832 97.085,52.921 97.085,53.716 96.832,53.969 96.474,53.969 96.222,53.716 96.222,52.921 96.132,52.832 96.006,52.832 95.917,52.921 95.917,53.716 95.664,53.969 95.306,53.969 95.053,53.716 95.053,52.921 94.964,52.832 94.838,52.832 94.748,52.921 94.748,53.716 94.495,53.969 94.138,53.969 93.885,53.716 93.885,52.921 93.795,52.832 93.669,52.832 93.58,52.921 93.58,53.716 93.327,53.969 92.969,53.969 92.716,53.716 92.716,52.921 92.627,52.832 92.501,52.832 92.412,52.921 92.412,53.716 92.159,53.969 91.801,53.969 91.548,53.716 91.548,52.921 91.459,52.832 91.332,52.832 91.243,52.921 91.243,53.716 90.99,53.969 90.632,53.969 90.38,53.716 90.38,52.921 90.29,52.832 90.164,52.832 90.075,52.921 90.075,53.716 89.822,53.969 89.464,53.969 89.211,53.716 89.211,52.979 89.122,52.89 88.806,52.89 87.299,51.383 87.299,50.83 87.189,50.719 ; 105.74,52.178 107.207,52.178 107.425,51.96 115.071,51.96 115.71,52.599 116.391,52.599 117.03,51.96 117.669,51.96 117.772,52.062 ; J1.D7@117.6,52.375 117.671,52.304 cw(c117.429,52.062) 117.772,52.062 ; J1.D7@117.856,52.705 117.856,52.146 ; J1.D7@118.125,52.425 117.863,52.163 ccw(c117.88,52.146) 117.856,52.146 ; 117.772,52.062 117.856,52.146
DID7-: J1.D8 U19.104 | length 57.7
  Top Layer w0.152: U19.104@87.689,49.843 87.689,50.719 ; U19.104@87.689,50.493 87.689,50.719 ; 104.8,51.689 104.8,51.791 104.692,51.899 103.64,51.899 103.511,51.77 103.511,50.762 103.258,50.509 102.901,50.509 102.648,50.762 102.648,51.809 102.558,51.899 102.432,51.899 102.343,51.809 102.343,50.762 102.09,50.509 101.732,50.509 101.479,50.762 101.479,52.289 101.39,52.378 101.264,52.378 101.175,52.289 101.175,51.958 100.922,51.705 100.564,51.705 100.311,51.958 100.311,52.289 100.222,52.378 100.095,52.378 100.006,52.289 100.006,52.167 99.753,51.914 99.395,51.914 99.143,52.167 99.143,52.916 99.053,53.005 98.927,53.005 98.838,52.916 98.838,52.724 98.585,52.471 98.227,52.471 97.974,52.724 97.974,52.915 97.968,52.921 97.968,53.059 97.885,53.142 97.759,53.142 97.669,53.053 97.669,52.805 97.416,52.552 97.059,52.552 96.806,52.805 96.806,53.6 96.716,53.69 96.59,53.69 96.501,53.6 96.501,52.805 96.248,52.552 95.89,52.552 95.637,52.805 95.637,53.6 95.548,53.69 95.422,53.69 95.333,53.6 95.333,52.805 95.08,52.552 94.722,52.552 94.469,52.805 94.469,53.6 94.38,53.69 94.253,53.69 94.164,53.6 94.164,52.805 93.911,52.552 93.553,52.552 93.301,52.805 93.301,53.6 93.211,53.69 93.085,53.69 92.996,53.6 92.996,52.805 92.743,52.552 92.385,52.552 92.132,52.805 92.132,53.6 92.043,53.69 91.917,53.69 91.827,53.6 91.827,52.805 91.574,52.552 91.217,52.552 90.964,52.805 90.964,53.6 90.874,53.69 90.748,53.69 90.659,53.6 90.659,52.805 90.406,52.552 90.048,52.552 89.795,52.805 89.795,53.6 89.706,53.69 89.58,53.69 89.491,53.6 89.491,52.863 89.238,52.61 88.922,52.61 87.579,51.267 87.579,50.83 87.689,50.719 ; 104.802,51.689 104.802,51.584 105.077,51.31 105.54,51.31 105.789,51.559 105.789,51.765 ; 105.791,51.765 105.924,51.899 107.08,51.899 107.298,51.68 115.071,51.68 115.71,51.041 116.751,51.041 116.916,51.206 116.916,51.511 117.085,51.68 117.662,51.68 117.856,51.486 ; J1.D8@117.55,51.075 117.782,51.307 ccw(c117.603,51.486) 117.856,51.486 ; J1.D8@117.805,50.698 117.831,50.724 J1.D8@117.843,50.736 ; J1.D8@117.805,50.724 117.818,50.737 J1.D8@117.831,50.749 ; J1.D8@117.805,50.775 117.831,50.8 J1.D8@117.831,50.749 ; J1.D8@118.15,51.025 118.135,51.04 117.974,51.201 cw(c118.259,51.486) 117.856,51.486 ; J1.D8@117.831,50.749 117.856,50.775 117.856,51.486
DQ0+: J1.A15 U19.58 | length 78.3
  Top Layer w0.152: U19.58@88.189,27.993 88.189,27.767 ; U19.58@88.189,28.643 88.189,27.767 ; J1.A15@123.876,32.487 123.901,32.461 124.46,32.461 ; J1.A15@124.1,32.075 124.442,32.186 ; J1.A15@124.15,32.75 124.46,32.461 ; 124.9,31.975 124.442,32.186 ; 88.189,27.767 88.299,27.656 88.299,26.94 89.656,25.583 101.411,25.583 105.227,29.399 106.463,29.399 106.979,28.883 106.979,25.654 107.232,25.401 107.589,25.401 107.842,25.654 107.842,26.667 107.932,26.756 108.058,26.756 108.147,26.667 108.147,26.071 108.4,25.818 108.758,25.818 109.011,26.071 109.011,29.918 109.1,30.007 109.226,30.007 109.315,29.918 109.315,27.255 109.568,27.002 109.926,27.002 110.179,27.255 110.179,30.871 110.268,30.96 110.395,30.96 110.484,30.871 110.484,29.252 110.737,28.999 111.095,28.999 111.347,29.252 111.347,30.871 111.437,30.96 111.563,30.96 111.652,30.871 111.652,29.658 111.905,29.405 112.263,29.405 112.516,29.658 112.516,30.883 112.636,31.003 114.728,31.003 115.992,29.739 117.073,29.739 117.399,29.413 118.364,29.413 119.355,30.404 119.355,32.182 119.456,32.283 119.558,32.283 119.659,32.182 119.659,31.42 120.015,31.064 120.65,31.064 121.056,31.471 121.056,32.106 121.641,32.69 122.657,32.69 123.292,33.325 125.476,33.325 126.009,32.791 126.009,30.302 125.755,30.048 125.374,30.048 124.943,30.48 124.943,31.979 124.738,32.183 ; 124.442,32.186 124.25,32.275 124.2,32.425 124.738,32.183 ; 124.46,32.461 124.738,32.183
DQ0-: J1.A16 U19.59 | length 78.2
  Top Layer w0.152: U19.59@88.689,27.993 88.689,27.767 ; U19.59@88.689,28.643 88.689,27.767 ; J1.A16@123.475,30.125 123.504,30.095 123.825,29.769 ; J1.A16@123.825,30.41 123.825,29.769 ; J1.A16@124.05,30.1 123.825,29.769 ; J1.A16@124.225,30.225 124.201,30.185 124,29.85 123.987,29.825 ; 88.689,27.767 88.579,27.656 88.579,27.056 89.772,25.863 101.295,25.863 105.132,29.699 106.558,29.699 107.258,28.999 107.258,25.769 107.347,25.68 107.474,25.68 107.563,25.769 107.563,26.782 107.816,27.035 108.174,27.035 108.426,26.782 108.426,26.187 108.516,26.098 108.642,26.098 108.731,26.187 108.731,30.033 108.984,30.286 109.342,30.286 109.595,30.033 109.595,27.371 109.684,27.282 109.81,27.282 109.9,27.371 109.9,30.987 110.153,31.24 110.51,31.24 110.763,30.987 110.763,29.367 110.853,29.278 110.979,29.278 111.068,29.367 111.068,30.987 111.321,31.24 111.679,31.24 111.932,30.987 111.932,29.774 112.021,29.684 112.147,29.684 112.236,29.774 112.236,30.998 112.52,31.282 114.844,31.282 116.108,30.018 117.225,30.018 117.535,29.709 118.228,29.709 119.05,30.531 119.05,32.664 119.228,32.842 119.441,32.842 119.939,32.345 119.939,31.572 120.142,31.369 120.498,31.369 120.752,31.623 120.752,32.233 121.539,33.02 122.53,33.02 123.165,33.655 125.603,33.655 126.34,32.918 126.34,30.15 125.933,29.743 125.197,29.743 125.146,29.794 124.384,29.794 124.231,29.642 124.056,29.642 ; 123.825,29.769 123.952,29.642 124.056,29.642 ; 123.985,29.832 124.05,30.05 123.95,29.925 123.985,29.832 ; 123.985,29.832 123.975,29.8 123.987,29.825 ; 123.985,29.832 123.987,29.825 ; 123.987,29.825 124.056,29.642
DQ1+: J1.D15 U19.60 | length 57.8
  Top Layer w0.152: U19.60@89.189,27.993 89.189,27.767 ; U19.60@89.189,28.643 89.189,27.767 ; 94.92,26.187 95.047,26.187 95.339,26.479 95.339,29.4 95.402,29.464 95.504,29.464 ; 94.92,26.188 93.827,26.188 93.624,26.391 93.624,29.616 93.472,29.769 93.218,29.769 93.116,29.667 93.116,26.391 92.914,26.188 90.211,26.188 89.646,26.753 89.646,26.756 89.299,27.103 89.299,27.656 89.189,27.767 ; 95.555,29.464 95.643,29.375 95.643,26.406 95.896,26.154 96.254,26.154 96.507,26.406 96.507,29.784 96.596,29.873 96.722,29.873 96.812,29.784 96.812,26.406 97.065,26.154 101.134,26.154 101.727,26.746 ; 101.702,26.715 104.994,30.008 107.635,30.008 107.798,29.845 107.798,28.346 107.899,28.245 108.128,28.245 108.241,28.358 108.241,30.062 109.782,31.602 114.802,31.602 115.4,32.2 116.757,32.2 117.018,32.461 J1.D15@117.805,32.461 ; 117.001,32.444 117.102,32.444 ; J1.D15@117.525,32.15 117.322,32.353 ccw(c117.102,32.134) 117.102,32.444 ; J1.D15@117.525,32.75 117.52,32.745 117.302,32.527 cw(c117.102,32.728) 117.198,32.461 cw(c117.102,32.728) 117.102,32.444
DQ1-: J1.D16 U19.61 | length 57.7
  Top Layer w0.152: U19.61@89.689,27.993 89.689,27.767 ; U19.61@89.689,28.643 89.689,27.767 ; 92.837,26.468 90.326,26.468 89.935,26.859 89.935,26.863 89.579,27.219 89.579,27.656 89.689,27.767 ; 92.864,26.495 92.864,29.796 93.116,30.048 93.574,30.048 93.877,29.745 ; 93.878,27.508 93.878,27.485 ; 93.878,29.743 93.877,29.745 ; 94.336,26.467 94.285,26.467 ; J1.D16@117.525,30.725 117.728,30.928 ccw(c117.509,31.148) 117.819,31.148 ccw(c118.103,31.148) 117.831,31.069 ccw(c118.103,31.148) 117.902,30.948 J1.D16@118.125,30.725 ; J1.D16@117.831,30.378 117.831,30.41 117.831,31.242 118.593,32.004 118.593,32.741 118.11,33.223 117.348,33.223 116.604,32.479 115.284,32.479 114.687,31.882 109.666,31.882 108.071,30.287 104.878,30.287 101.033,26.441 97.231,26.441 97.091,26.581 97.091,29.9 96.838,30.153 96.48,30.153 96.228,29.9 96.228,26.522 96.138,26.433 96.012,26.433 95.923,26.522 95.923,29.553 95.707,29.769 95.301,29.769 95.047,29.515 95.047,26.619 94.895,26.468 94.286,26.468 94.285,26.467 ; 93.877,29.745 93.877,27.486 93.878,27.485 ; 93.878,27.485 93.878,26.746 94.158,26.467 94.285,26.467
DQ2+: J1.C13 U19.65 | length 67.6
  Top Layer w0.152: U19.65@94.039,31.493 94.915,31.493 ; U19.65@94.689,31.493 94.915,31.493 ; 119.687,34.322 cw(c120.177,33.832) 119.737,34.367 cw(c120.177,33.832) 120.177,34.525 J1.C13@120.325,34.525 ; 119.749,34.384 ccw(c119.446,34.688) 119.875,34.688 J1.C13@119.875,34.95 ; J1.C13@120.32,34.879 J1.C13@120.32,34.95 ; J1.C13@120.345,34.976 120.337,34.968 J1.C13@120.32,34.95 ; 94.915,31.493 95.026,31.603 95.196,31.603 95.348,31.446 95.348,30.204 95.441,30.112 95.771,30.112 95.894,30.235 95.894,31.445 96.066,31.603 96.165,31.603 96.317,31.451 96.317,30.784 96.416,30.685 96.7,30.685 96.788,30.774 96.788,31.445 96.947,31.603 97.065,31.603 97.168,31.5 97.672,31.5 97.761,31.411 97.761,27.494 98.014,27.241 98.371,27.241 98.624,27.494 98.624,31.423 98.714,31.512 98.84,31.512 98.929,31.423 98.929,27.494 99.182,27.241 99.54,27.241 99.793,27.494 99.793,31.423 99.882,31.512 100.008,31.512 100.098,31.423 100.098,27.494 100.351,27.241 100.708,27.241 100.961,27.494 100.961,31.037 101.05,31.126 101.177,31.126 101.266,31.037 101.266,28.062 101.519,27.809 101.877,27.809 102.13,28.062 102.13,30.768 102.219,30.857 102.345,30.857 102.434,30.768 102.434,29.177 102.687,28.924 103.045,28.924 103.298,29.177 103.298,29.916 104.446,31.064 104.673,31.064 105.11,31.5 108.621,31.5 109.403,32.283 112.399,32.283 113.89,33.773 114.673,33.773 115.719,34.819 117.042,34.819 117.965,33.895 119.265,33.895 J1.C13@120.32,34.95
DQ2-: J1.C14 U19.66 | length 67.6
  Top Layer w0.152: U19.66@94.039,31.993 94.915,31.993 ; U19.66@94.689,31.993 94.915,31.993 ; J1.C14@120.294,32.918 J1.C14@120.325,32.95 121.053,33.677 121.053,35.362 120.612,35.803 119.988,35.803 119.403,35.218 119.403,34.491 119.087,34.175 118.078,34.175 117.155,35.098 115.603,35.098 114.557,34.053 113.774,34.053 112.283,32.562 109.288,32.562 108.505,31.78 104.983,31.78 104.546,31.344 104.369,31.344 103.019,29.994 103.019,29.292 102.929,29.203 102.803,29.203 102.714,29.292 102.714,30.884 102.461,31.136 102.103,31.136 101.85,30.884 101.85,28.178 101.761,28.089 101.635,28.089 101.545,28.178 101.545,31.153 101.292,31.406 100.935,31.406 100.682,31.153 100.682,27.609 100.593,27.52 100.466,27.52 100.377,27.609 100.377,31.538 100.124,31.791 99.766,31.791 99.513,31.538 99.513,27.609 99.424,27.52 99.298,27.52 99.209,27.609 99.209,31.538 98.956,31.791 98.598,31.791 98.345,31.538 98.345,27.609 98.256,27.52 98.129,27.52 98.04,27.609 98.04,31.527 97.787,31.78 97.283,31.78 97.18,31.883 95.026,31.883 94.915,31.993 ; J1.C14@120.325,33.4 120.473,33.4 ccw(c120.473,34.093) 120.963,33.603 ; J1.C14@120.775,32.975 120.775,33.237 cw(c121.204,33.237) 120.84,33.464 cw(c121.204,33.237) 120.901,33.541
DQ3+: J1.F13 U19.67 | length 48.4
  Top Layer w0.152: U19.67@94.039,32.493 94.915,32.493 ; U19.67@94.689,32.493 94.915,32.493 ; v1(97.584,32.354) 97.335,32.603 95.026,32.603 94.915,32.493
  Bottom Layer w0.152: v1@97.612,32.334 98.933,32.334 99.424,31.843 99.424,30.159 99.677,29.906 100.035,29.906 100.287,30.159 100.287,32.946 100.377,33.035 100.503,33.035 100.592,32.946 100.592,30.16 100.845,29.907 101.203,29.907 101.456,30.16 101.456,32.946 101.545,33.035 101.671,33.035 101.761,32.946 101.761,30.165 102.014,29.912 102.371,29.912 102.624,30.165 102.624,32.946 102.714,33.035 102.84,33.035 102.929,32.946 102.929,30.167 103.182,29.915 103.54,29.915 103.793,30.167 103.793,32.946 103.882,33.035 112.939,33.035 113.411,32.563 113.64,32.563 113.97,32.233 114.732,32.233 115.062,32.563 115.062,33.274 114.325,34.011 114.325,34.102 ; J1.F13@113.975,34.7 114.15,34.525 cw(c113.727,34.102) 114.325,34.102 ; J1.F13@114.325,34.874 114.325,34.102 ; J1.F13@114.675,34.7 114.501,34.526 ccw(c114.926,34.102) 114.325,34.102
DQ3-: J1.F14 U19.68 | length 48
  Top Layer w0.152: U19.68@94.039,32.993 94.915,32.993 ; U19.68@94.689,32.993 94.915,32.993 ; v1(97.584,33.132) 97.335,32.883 95.026,32.883 94.915,32.993
  Bottom Layer w0.152: v1(97.584,33.132) 98.102,32.614 99.06,32.614 99.703,31.97 99.703,30.275 99.793,30.186 99.919,30.186 100.008,30.275 100.008,33.062 100.261,33.314 100.619,33.314 100.872,33.062 100.872,30.276 100.961,30.186 101.087,30.186 101.176,30.276 101.176,33.062 101.429,33.314 101.787,33.314 102.04,33.062 102.04,30.28 102.129,30.191 102.256,30.191 102.345,30.28 102.345,33.062 102.598,33.314 102.956,33.314 103.208,33.062 103.208,30.283 103.298,30.194 103.424,30.194 103.513,30.283 103.513,33.062 103.766,33.314 111.673,33.314 111.684,33.325 ; 111.699,33.314 111.912,33.528 111.912,35.027 112.166,35.281 112.37,35.281 112.624,35.027 112.624,33.528 112.837,33.314 113.091,33.314 113.462,32.944 113.581,32.944 ; J1.F14@114,33.25 113.774,33.024 cw(c113.581,33.217) 113.581,32.944 ; J1.F14@114.025,32.625 113.795,32.855 ccw(c113.581,32.64) 113.581,32.944 ; J1.F14@114.351,32.995 114.316,32.959 114.3,32.944 113.581,32.944
DQ4+: J1.A13 U19.69 | length 77.4
  Top Layer w0.152: U19.69@94.039,33.493 94.915,33.493 ; U19.69@94.689,33.493 94.915,33.493 ; J1.A13@123.8,37.95 123.825,37.95 123.948,37.95 ccw(c123.948,38.643) 124.411,38.128 ccw(c123.948,38.643) 124.438,38.153 ; J1.A13@123.825,37.541 124.816,38.532 125.578,38.532 126.162,37.948 126.162,34.9 125.552,34.29 123.241,34.29 122.009,35.522 121.288,35.522 120.497,36.313 117.488,36.313 116.697,35.522 114.893,35.522 114.612,35.803 112.452,35.803 112.324,35.675 112.324,33.097 112.071,32.844 111.714,32.844 111.461,33.097 111.461,33.254 111.371,33.344 111.245,33.344 111.156,33.254 111.156,33.097 110.903,32.844 110.545,32.844 110.292,33.097 110.292,33.254 110.203,33.343 110.077,33.343 109.988,33.254 109.988,33.097 109.735,32.844 109.377,32.844 109.124,33.097 109.124,33.254 109.035,33.343 108.908,33.343 108.819,33.254 108.819,32.779 108.566,32.526 108.208,32.526 107.956,32.779 107.956,33.254 107.866,33.343 107.74,33.343 107.651,33.254 107.651,32.321 107.398,32.068 107.04,32.068 106.787,32.321 106.787,33.256 106.698,33.345 106.572,33.345 106.482,33.256 106.482,32.321 106.229,32.068 105.872,32.068 105.619,32.321 105.619,33.253 105.529,33.343 105.403,33.343 105.314,33.253 105.314,32.321 105.061,32.068 104.703,32.068 104.45,32.321 104.45,33.254 104.361,33.343 104.235,33.343 104.146,33.254 104.146,32.061 103.893,31.808 103.535,31.808 103.282,32.061 103.282,34.086 103.193,34.175 103.066,34.175 102.977,34.086 102.977,31.673 102.724,31.42 102.366,31.42 102.114,31.673 102.114,34.612 102.024,34.702 101.898,34.702 101.809,34.612 101.809,31.964 101.556,31.711 101.198,31.711 100.945,31.964 100.945,34.612 100.856,34.702 100.73,34.702 100.64,34.612 100.64,32.324 100.387,32.071 99.953,32.071 99.749,32.275 99.749,34.604 99.65,34.703 99.338,34.703 99.248,34.614 99.248,34.229 99.159,34.14 99.033,34.14 98.944,34.229 98.944,34.614 98.854,34.703 98.606,34.703 98.334,34.431 98.334,33.452 98.245,33.363 98.119,33.363 98.029,33.452 98.029,33.785 97.94,33.874 97.777,33.874 97.506,33.603 96.899,33.603 96.81,33.514 96.81,33.251 96.721,33.162 96.595,33.162 96.505,33.251 96.505,33.514 96.416,33.603 96.29,33.603 96.2,33.514 96.2,33.251 96.111,33.162 95.985,33.162 95.896,33.251 95.896,33.514 95.806,33.603 95.68,33.603 95.591,33.514 95.591,33.251 95.502,33.162 95.375,33.162 95.286,33.251 95.286,33.514 95.197,33.603 95.026,33.603 94.915,33.493 ; J1.A13@124.25,37.525 124.25,37.787 cw(c124.679,37.787) 124.376,38.091
DQ4-: J1.A14 U19.70 | length 77.9
  Top Layer w0.152: U19.70@94.039,33.993 94.915,33.993 ; U19.70@94.689,33.993 94.915,33.993 ; J1.A14@123.876,35.484 123.927,35.433 124.509,35.433 ; J1.A14@124.125,35.125 124.157,35.157 124.348,35.348 cw(c124.548,35.147) 124.548,35.431 ; J1.A14@124.125,35.725 124.328,35.522 ccw(c124.548,35.741) 124.509,35.433 ; J1.A14@124.125,35.825 124.137,35.813 124.531,35.433 ; 124.719,35.431 124.548,35.431 ; 94.915,33.993 95.026,33.883 97.39,33.883 98.49,34.983 99.766,34.983 100.028,34.72 100.028,32.391 100.069,32.35 100.272,32.35 100.361,32.439 100.361,34.728 100.614,34.981 100.972,34.981 101.225,34.728 101.225,32.08 101.314,31.991 101.44,31.991 101.529,32.08 101.529,34.728 101.782,34.981 102.14,34.981 102.393,34.728 102.393,31.789 102.482,31.7 102.608,31.7 102.698,31.789 102.698,34.202 102.951,34.455 103.308,34.455 103.561,34.202 103.561,32.177 103.651,32.088 103.777,32.088 103.866,32.177 103.866,33.369 104.119,33.622 104.477,33.622 104.73,33.369 104.73,32.436 104.819,32.347 104.945,32.347 105.035,32.436 105.035,33.369 105.287,33.622 105.645,33.622 105.898,33.369 105.898,32.436 105.987,32.347 106.114,32.347 106.203,32.436 106.203,33.371 106.456,33.624 106.814,33.624 107.067,33.371 107.067,32.436 107.156,32.347 107.282,32.347 107.371,32.436 107.371,33.369 107.624,33.622 107.982,33.622 108.235,33.369 108.235,32.895 108.324,32.806 108.45,32.806 108.54,32.895 108.54,33.37 108.793,33.623 109.15,33.623 109.403,33.37 109.403,33.213 109.493,33.123 109.619,33.123 109.708,33.213 109.708,33.369 109.961,33.622 110.319,33.622 110.572,33.369 110.572,33.213 110.661,33.123 110.787,33.123 110.877,33.213 110.877,33.37 111.129,33.623 111.487,33.623 111.74,33.37 111.74,33.213 111.829,33.123 111.956,33.123 112.045,33.213 112.045,35.791 112.298,36.044 112.337,36.083 114.728,36.083 115.009,35.801 116.581,35.801 117.372,36.593 120.613,36.593 121.404,35.801 122.187,35.801 123.393,34.595 125.4,34.595 125.857,35.052 125.857,37.77 125.451,38.176 124.943,38.176 124.689,37.922 124.689,37.465 124.892,37.262 125.273,37.262 125.451,37.084 125.451,36.932 125.247,36.728 124.206,36.728 124.028,36.551 124.028,36.449 124.231,36.246 124.917,36.246 125.197,35.966 125.197,35.585 125.044,35.433 124.531,35.433 ; 124.509,35.433 ccw(c124.548,35.741) 124.548,35.431 ; 124.509,35.433 124.531,35.433